# Altium PCB Control.Board.PcbDoc
Units mil, origin at the board's own origin, x right, y up, seen from the top; angles counter-clockwise.
Board outline 3070.87 x 4803.15 mil, 2 copper layers (Top Layer, Bottom Layer); 67 components, 96 nets, 356 pads, 14 vias.
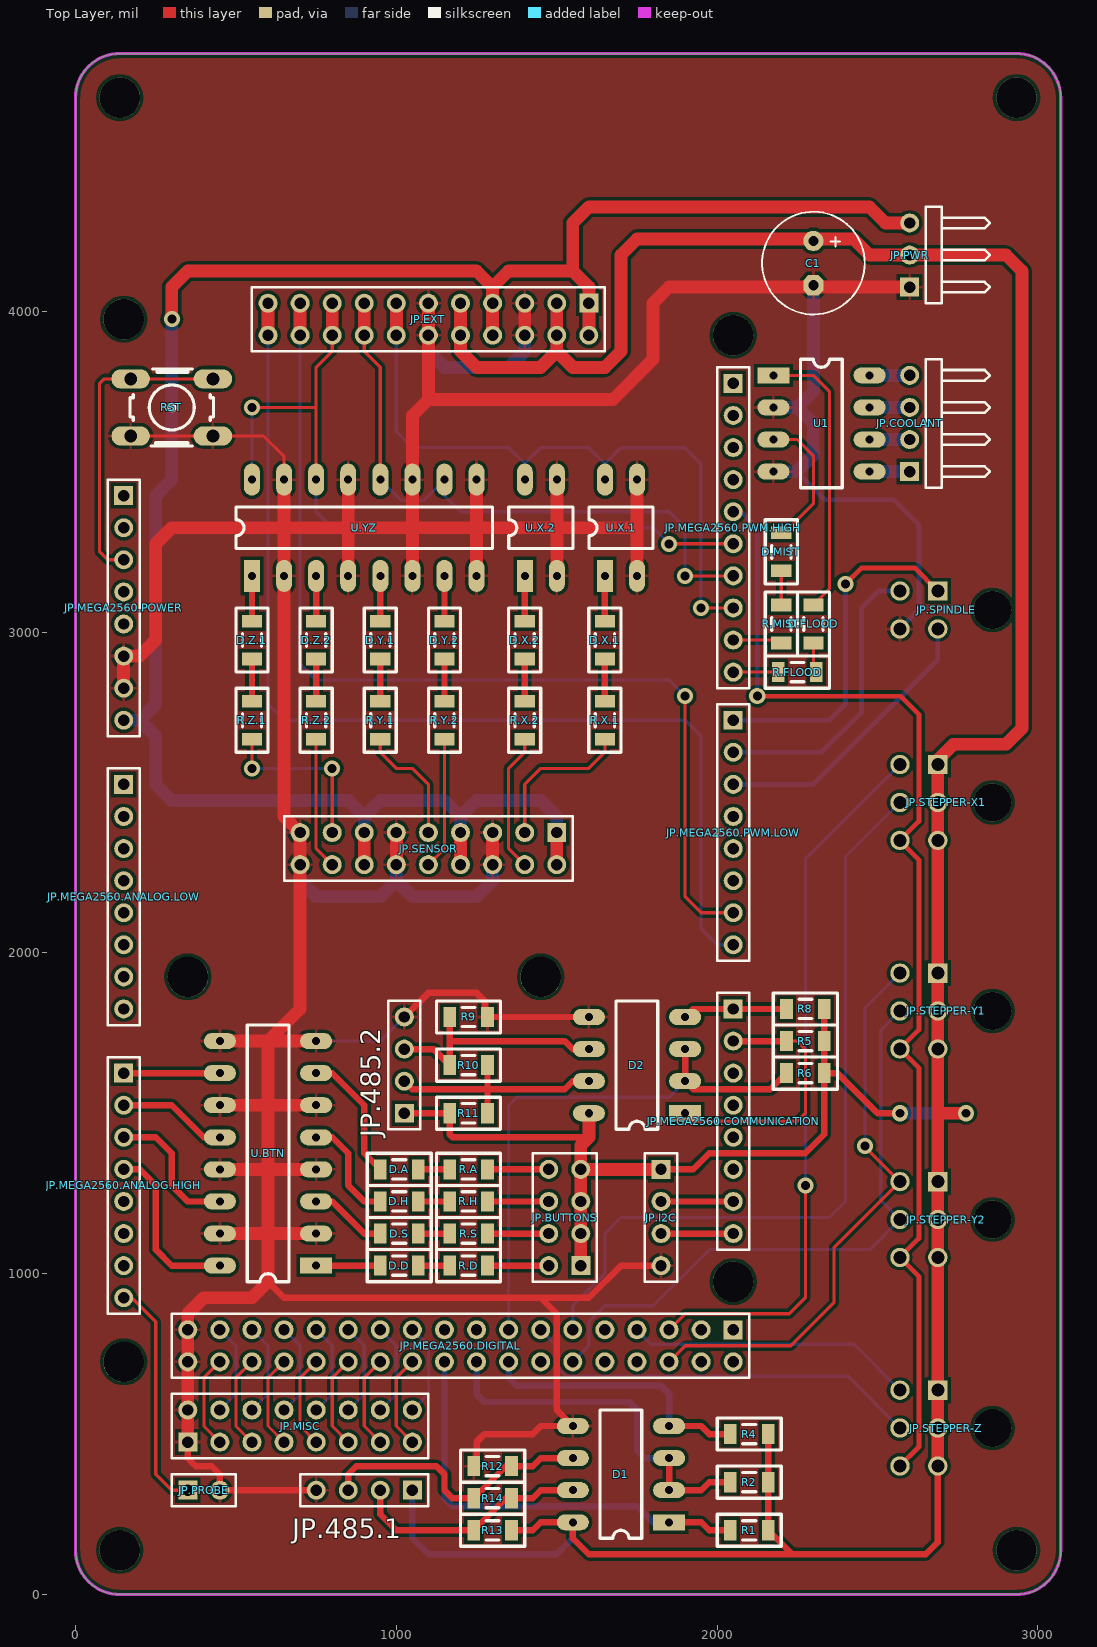
[diagram p0: Top Layer view]
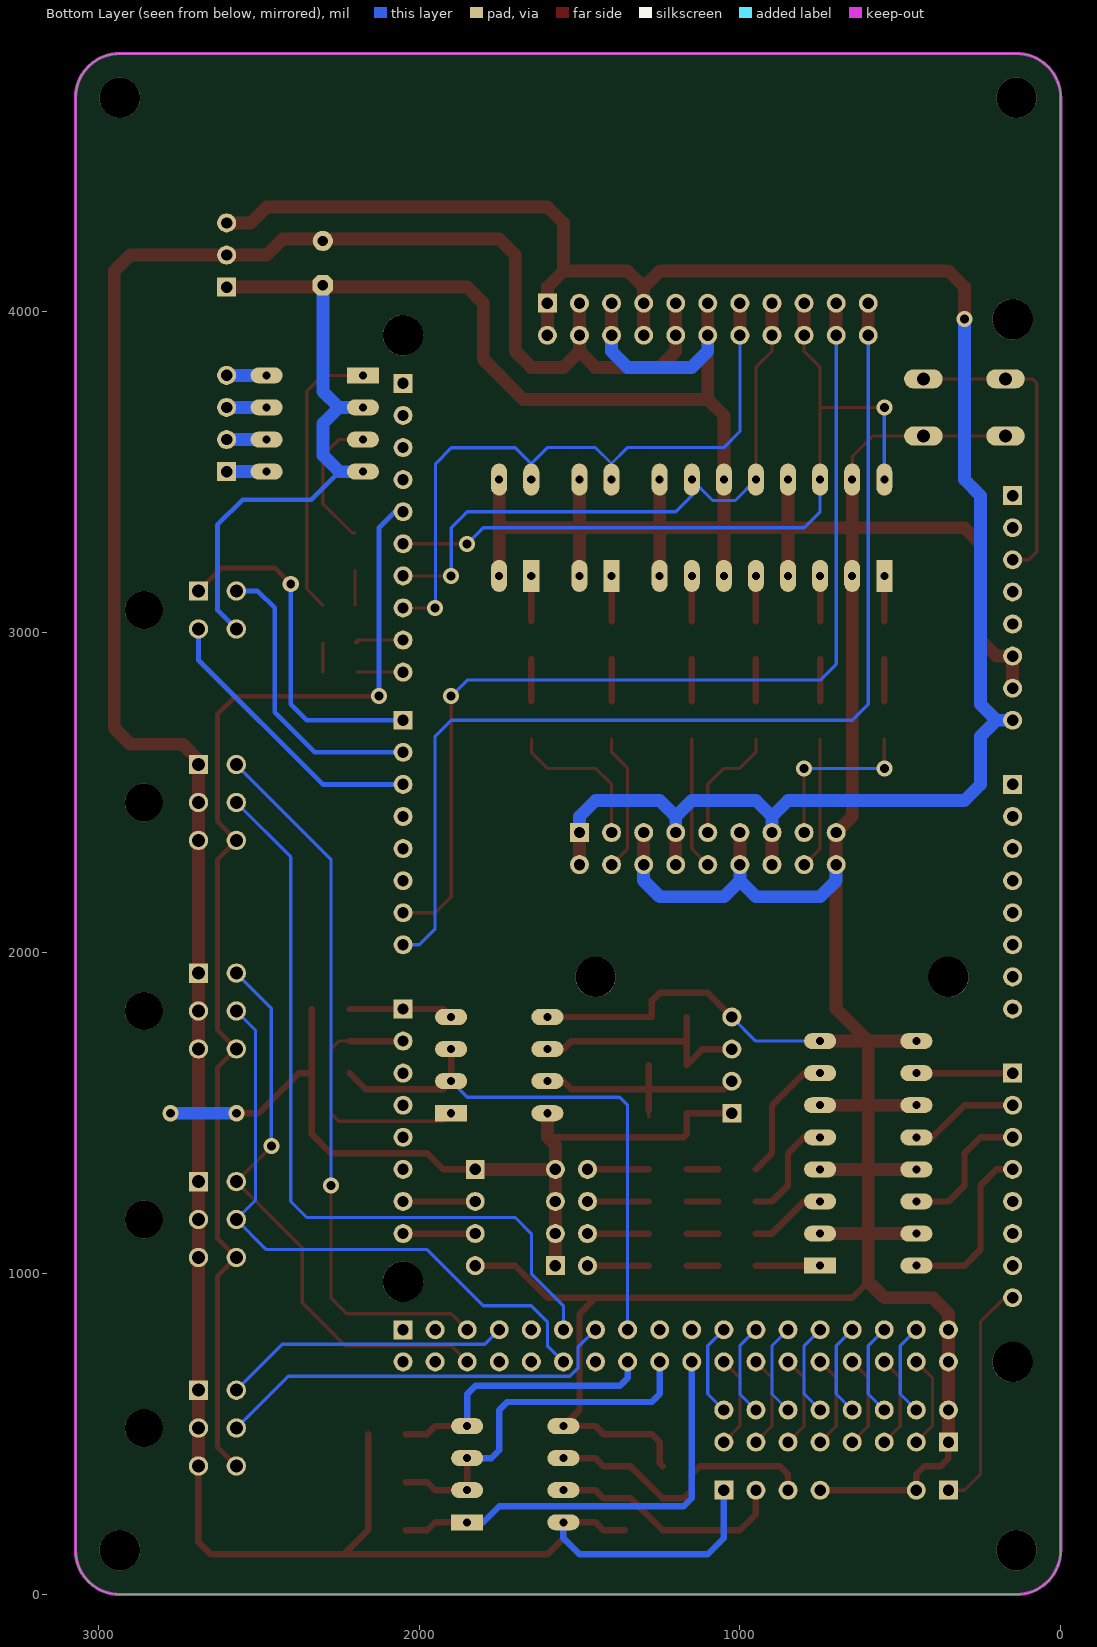
[diagram p1: Bottom Layer view, seen from below]
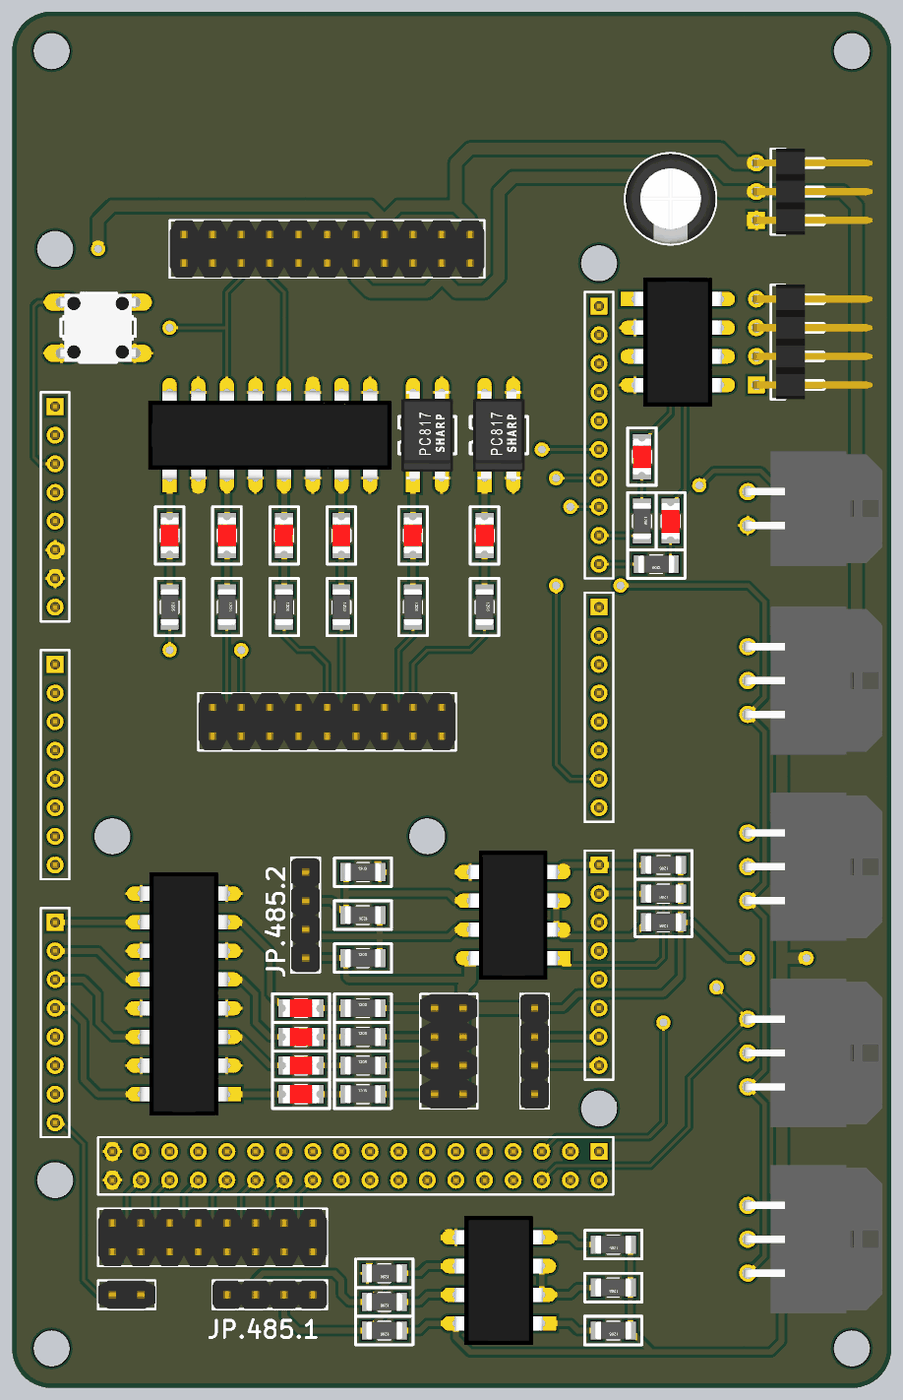
[diagram p2: 3D render of the assembled board from above, using the file's embedded part models]

## Layer stack, top to bottom
Top Solder: solder mask 0.4, Solder Resist, Dk 3.5
Top Layer: signal copper 1.4
Dielectric 1: dielectric 12.6, FR-4, Dk 4.8
Bottom Layer: signal copper 1.4
Bottom Solder: solder mask 0.4, Solder Resist, Dk 3.5

## Board outline
137.8,0 cw(c137.8,137.8) 0,137.8 0,4665.35 cw(c137.8,4665.35) 137.8,4803.15 2933.07,4803.15 cw(c2933.07,4665.35) 3070.87,4665.35 3070.87,137.8 cw(c2933.07,137.8) 2933.07,0

## Design rules (kind name [scope] priority, off if disabled: settings)
Clearance [All] p1: gap=10
HoleSize [All] p1: absolutevalues=TRUE maxlimit=248.03 minlimit=7.87 maxpercent=80.000 minpercent=20.000
PolygonConnect [All] p1: connectstyle=Relief reliefconductorwidth=10 reliefentries=4 polygonreliefangle="90 Angle" airgapwidth=10
RoutingVias [All] p1: holewidth=28 width=50 viastyle="Through Hole" minholewidth=28 minwidth=50 maxholewidth=28 maxwidth=50
SMDNeckDown [All] p1: percent=75.000
SilkToSilkClearance [All] p1: silktosilkclearance=6
SolderMaskExpansion [All] p1: expansion=4
Width [All] p1: maxlimit=100 minlimit=10 preferedwidth=10
28 further rules are at their usual default settings.

## Components (designator, comment, footprint, x,y, rotation, side; value= is the part's Value field where it differs from the comment)
C1 "*" E3,5-8 2300,4150 r270 top
D1 "MAX485" DIP8 1700,375 r180 top
D2 "MAX485" DIP8 1750,1650 r180 top
D.A "LED" 1206-SMD-LED 1009.06,1325 r180 top
D.D "LED" 1206-SMD-LED 1009.06,1025 r180 top
D.FLOOD "LED" 1206-SMD-LED 2300,3025 r90 top
D.H "LED" 1206-SMD-LED 1009.06,1225 r180 top
D.MIST "LED" 1206-SMD-LED 2200,3250 r90 top
D.S "LED" 1206-SMD-LED 1009.06,1125 r180 top
D.X.1 "LED" 1206-SMD-LED 1650,2975 r90 top
D.X.2 "LED" 1206-SMD-LED 1400,2975 r90 top
D.Y.1 "LED" 1206-SMD-LED 950,2975 r90 top
D.Y.2 "LED" 1206-SMD-LED 1150,2975 r90 top
D.Z.1 "LED" 1206-SMD-LED 550,2975 r90 top
D.Z.2 "LED" 1206-SMD-LED 750,2975 r90 top
JP.485.1 "HDR4" HDR1X4 900,325 r180 top
JP.485.2 "HDR4" HDR1X4 1025,1650 r90 top
JP.BUTTONS "HDR2X4" HDR2X4 1525,1175 r90 top
JP.COOLANT "HDR4" HDR1X4H 2600,3650 r90 top
JP.EXT "HDR2X11" HDR2X11 1100,3975 r180 top
JP.I2C "HDR4" HDR1X4 1825,1175 r270 top
JP.MEGA2560.ANALOG.HIGH "HDR8" HDR8-BOTTOM 150,1275 r270 top
JP.MEGA2560.ANALOG.LOW "HDR8" HDR8-BOTTOM 150,2175 r270 top
JP.MEGA2560.COMMUNICATION "HDR8" HDR8-BOTTOM 2050,1475 r270 top
JP.MEGA2560.DIGITAL "HDR2X18" HDR2X18-BOTTOM 1200,775 r180 top
JP.MEGA2560.POWER "HDR8" HDR8-BOTTOM 150,3075 r270 top
JP.MEGA2560.PWM.HIGH "HDR10" HDR10-BOTTOM 2050,3325 r270 top
JP.MEGA2560.PWM.LOW "HDR8" HDR8-BOTTOM 2050,2375 r270 top
JP.MISC "HDR2X8" HDR2X8 700,525 r0 top
JP.PROBE "HDR2" HDR1X2 400,325 r0 top
JP.PWR "HDR3" HDR1X3H 2600,4175 r90 top
JP.SENSOR "HDR2X9" HDR2X9 1100,2325 r180 top
JP.SPINDLE "43045-0400" 43045-0400 2857.87,3068.7 r90 top
JP.STEPPER-X1 "43045-0600" 43045-0600 2857.87,2468.7 r90 top
JP.STEPPER-Y1 "43045-0600" 43045-0600 2857.87,1818.7 r90 top
JP.STEPPER-Y2 "43045-0600" 43045-0600 2857.87,1168.7 r90 top
JP.STEPPER-Z "43045-0600" 43045-0600 2857.87,518.7 r90 top
R1 "10K" 1206-SMD-RES 2100,200 r0 top
R2 "10K" 1206-SMD-RES 2100,350 r0 top
R4 "10K" 1206-SMD-RES 2100,500 r0 top
R5 "10K" 1206-SMD-RES 2275,1725 r0 top
R6 "10K" 1206-SMD-RES 2275,1625 r0 top
R8 "10K" 1206-SMD-RES 2275,1825 r0 top
R9 "20K" 1206-SMD-RES 1225,1800 r180 top
R10 "120" 1206-SMD-RES 1225,1650 r0 top
R11 "20K" 1206-SMD-RES 1225,1500 r180 top
R12 "10K" 1206-SMD-RES 1300,400 r0 top
R13 "20K" 1206-SMD-RES 1300,200 r0 top
R14 "120" 1206-SMD-RES 1300,300 r0 top
R.A "100" 1206-SMD-RES 1225,1325 r180 top
R.D "100" 1206-SMD-RES 1225,1025 r180 top
R.FLOOD "100" 1206-SMD-RES 2250,2875 r0 top
R.H "100" 1206-SMD-RES 1225,1225 r180 top
R.MIST "100" 1206-SMD-RES 2200,3025 r90 top
R.S "100" 1206-SMD-RES 1225,1125 r180 top
R.X.1 "470" 1206-SMD-RES 1650,2725 r90 top
R.X.2 "470" 1206-SMD-RES 1400,2725 r90 top
R.Y.1 "470" 1206-SMD-RES 950,2725 r90 top
R.Y.2 "470" 1206-SMD-RES 1150,2725 r90 top
R.Z.1 "470" 1206-SMD-RES 550,2725 r90 top
R.Z.2 "470" 1206-SMD-RES 750,2725 r90 top
RST "OMRON SWITCH" B3F-10XX 300,3700 r180 top
U1 "LTV827" DIP8 2325,3650 r0 top
U.BTN "LTV847" DIP16 600,1375 r180 top
U.X.1 "PC817" DIP4 1700,3325 r90 top
U.X.2 "PC817" DIP4 1450,3325 r90 top
U.YZ "LTV847" DIP16 900,3325 r90 top

## Footprints (in the part's own frame and the unit in brackets; to place one, negate y for a bottom-side part, rotate by r counter-clockwise, add the part's x,y. Pads: shape width x height; smd on the part's side, far side on the other; paste and mask are expansions set on the pad)
1206-SMD-LED [mm]
  rect 1x1.6 smd: 1(-1.5,0) 2(1.5,0)
  silkscreen extent -2.54,-1.27 2.54,1.27, body extent -1.6,-0.8 1.6,0.8, height 1.11
1206-SMD-RES [mm]
  rect 1x1.6 smd: 1(-1.5,0) 2(1.5,0)
  silkscreen extent -2.54,-1.27 2.54,1.27, body extent -1.6,-0.8 1.6,0.8, height 1.01
43045-0400 [mm]
  round 3 hole 3 unplated: 0(0,0)
  rect 1.53x1.53 hole 1.02: 1(1.5,4.32)
  round 1.53 hole 1.02: 2(-1.5,4.32) 3(1.5,7.32) 4(-1.5,7.32)
  body extent -5.07,-4.6 5.07,7.64, height 8.78
43045-0600 [mm]
  round 3 hole 3 unplated: 0(0,0)
  rect 1.53x1.53 hole 1.02: 1(3,4.32)
  round 1.53 hole 1.02: 2(0,4.32) 3(-3,4.32) 4(3,7.32) 5(0,7.32) 6(-3,7.32)
  body extent -6.57,-4.6 6.57,7.64, height 8.78
B3F-10XX [mil]
  oval 120x60 hole 40: 1(-128,89) 2(128,89) 3(-128,-89) 4(128,-89)
  silkscreen extent -130,-120 130,120, body extent -152,-118 152,118, height 170
DIP4 [mil]
  rect 100x50 hole 25: 1(-150,49.64)
  oval 100x50 hole 25: 2(-150,-50.36) 3(150,-50.36) 4(150,49.64)
  silkscreen extent -65,-100 65,100, body extent -155,-90 155,90, height 169
DIP8 [mil]
  rect 100x50 hole 25: 1(-150,150)
  oval 100x50 hole 25: 2(-150,50) 3(-150,-50) 4(-150,-150) 5(150,-150) 6(150,-50) 7(150,50) 8(150,150)
  silkscreen extent -65,-200 65,200, body extent -155,-225 155,225, height 165
DIP16 [mil]
  rect 100x50 hole 25: 1(-150,350)
  oval 100x50 hole 25: 2(-150,250) 3(-150,150) 4(-150,50) 5(-150,-50) 6(-150,-150) 7(-150,-250) 8(-150,-350) 9(150,-350) 10(150,-250) 11(150,-150) 12(150,-50) 13(150,50) 14(150,150) 15(150,250) 16(150,350)
  silkscreen extent -65,-400 65,400, body extent -155,-425 155,425, height 165
E3,5-8 [mil]
  round 63 hole 32: +(-68.9,0)
  oct 63x63 hole 32: -(68.9,0)
  silkscreen extent -160,-160 160,160, body extent -158,-157 158,157, height 484
HDR1X2 [mm] "Connector; Header; 2 Position"
  rect 1.5x1.5 hole 0.9: 1(-1.27,0)
  round 1.5 hole 0.9: 2(1.27,0)
  silkscreen extent -2.54,-1.27 2.54,1.27, body extent -2.54,-1.27 2.54,1.27, height 8.61
HDR1X3H [mm] "Connector; Header; 3 Position; Right Angle"
  rect 1.5x1.5 hole 0.9: 1(-2.54,0)
  round 1.5 hole 0.9: 2(0,0) 3(2.54,0)
  silkscreen extent -3.81,-6.35 3.81,-1.27, body extent -3.81,-10.3 3.81,0.32, height 2.55
HDR1X4 [mm] "Connector; Header; 4 Position"
  rect 1.5x1.5 hole 0.9: 1(-3.81,0)
  round 1.5 hole 0.9: 2(-1.27,0) 3(1.27,0) 4(3.81,0)
  silkscreen extent -5.08,-1.27 5.08,1.27, body extent -5.08,-1.27 5.08,1.27, height 9.11
HDR1X4H [mm] "Connector; Header; 4 Position; Right Angle"
  rect 1.5x1.5 hole 0.9: 1(-3.81,0)
  round 1.5 hole 0.9: 2(-1.27,0) 3(1.27,0) 4(3.81,0)
  silkscreen extent -5.08,-6.35 5.08,-1.27, body extent -5.08,-10.3 5.08,0.32, height 2.55
HDR2X4 [mm] "Connector; Header; 4x2 Position"
  rect 1.5x1.5 hole 0.9: 1(-3.81,-1.27)
  round 1.5 hole 0.9: 2(-3.81,1.27) 3(-1.27,-1.27) 4(-1.27,1.27) 5(1.27,-1.27) 6(1.27,1.27) 7(3.81,-1.27) 8(3.81,1.27)
  silkscreen extent -5.08,-2.54 5.08,2.54, body extent -5.08,-2.54 5.08,2.54, height 8.61
HDR2X8 [mm] "Connector; Header; 8x2 Position"
  rect 1.5x1.5 hole 0.9: 1(-8.89,-1.27)
  round 1.5 hole 0.9: 2(-8.89,1.27) 3(-6.35,-1.27) 4(-6.35,1.27) 5(-3.81,-1.27) 6(-3.81,1.27) 7(-1.27,-1.27) 8(-1.27,1.27) 9(1.27,-1.27) 10(1.27,1.27) 11(3.81,-1.27) 12(3.81,1.27) 13(6.35,-1.27) 14(6.35,1.27) 15(8.89,-1.27) 16(8.89,1.27)
  silkscreen extent -10.16,-2.54 10.16,2.54, body extent -10.16,-2.54 10.16,2.54, height 8.61
HDR2X9 [mm] "Connector; Header; 9x2 Position"
  rect 1.5x1.5 hole 0.9: 1(-10.16,-1.27)
  round 1.5 hole 0.9: 2(-10.16,1.27) 3(-7.62,-1.27) 4(-7.62,1.27) 5(-5.08,-1.27) 6(-5.08,1.27) 7(-2.54,-1.27) 8(-2.54,1.27) 9(0,-1.27) 10(0,1.27) 11(2.54,-1.27) 12(2.54,1.27) 13(5.08,-1.27) 14(5.08,1.27) 15(7.62,-1.27) 16(7.62,1.27) 17(10.16,-1.27) 18(10.16,1.27)
  silkscreen extent -11.43,-2.54 11.43,2.54, body extent -11.43,-2.54 11.43,2.54, height 8.61
HDR2X11 [mm] "Connector; Header; 11x2 Position"
  rect 1.5x1.5 hole 0.9: 1(-12.7,-1.27)
  round 1.5 hole 0.9: 2(-12.7,1.27) 3(-10.16,-1.27) 4(-10.16,1.27) 5(-7.62,-1.27) 6(-7.62,1.27) 7(-5.08,-1.27) 8(-5.08,1.27) 9(-2.54,-1.27) 10(-2.54,1.27) 11(0,-1.27) 12(0,1.27) 13(2.54,-1.27) 14(2.54,1.27) 15(5.08,-1.27) 16(5.08,1.27) 17(7.62,-1.27) 18(7.62,1.27) 19(10.16,-1.27) 20(10.16,1.27) 21(12.7,-1.27) 22(12.7,1.27)
  silkscreen extent -13.97,-2.54 13.97,2.54, body extent -13.97,-2.54 13.97,2.54, height 8.61
HDR2X18-BOTTOM [mm]
  rect 1.5x1.5 hole 0.9: 1(-21.59,-1.27)
  round 1.5 hole 0.9: 2(-21.59,1.27) 3(-19.05,-1.27) 4(-19.05,1.27) 5(-16.51,-1.27) 6(-16.51,1.27) 7(-13.97,-1.27) 8(-13.97,1.27) 9(-11.43,-1.27) 10(-11.43,1.27) 11(-8.89,-1.27) 12(-8.89,1.27) 13(-6.35,-1.27) 14(-6.35,1.27) 15(-3.81,-1.27) 16(-3.81,1.27) 17(-1.27,-1.27) 18(-1.27,1.27) 19(1.27,-1.27) 20(1.27,1.27) 21(3.81,-1.27) 22(3.81,1.27) 23(6.35,-1.27) 24(6.35,1.27) 25(8.89,-1.27) 26(8.89,1.27) 27(11.43,-1.27) 28(11.43,1.27) 29(13.97,-1.27) 30(13.97,1.27) 31(16.51,-1.27) 32(16.51,1.27) 33(19.05,-1.27) 34(19.05,1.27) 35(21.59,-1.27) 36(21.59,1.27)
  silkscreen extent -22.86,-2.54 22.86,2.54, body extent -22.86,-2.54 22.86,2.54, height 8.61
HDR8-BOTTOM [mm]
  rect 1.5x1.5 hole 0.9: 1(-8.89,0)
  round 1.5 hole 0.9: 2(-6.35,0) 3(-3.81,0) 4(-1.27,0) 5(1.27,0) 6(3.81,0) 7(6.35,0) 8(8.89,0)
  silkscreen extent -10.16,-1.27 10.16,1.27, body extent -10.16,-1.27 10.16,1.27, height 9.11
HDR10-BOTTOM [mm]
  rect 1.5x1.5 hole 0.9: 1(-11.43,0)
  round 1.5 hole 0.9: 2(-8.89,0) 3(-6.35,0) 4(-3.81,0) 5(-1.27,0) 6(1.27,0) 7(3.81,0) 8(6.35,0) 9(8.89,0) 10(11.43,0)
  silkscreen extent -12.7,-1.27 12.7,1.27, body extent -12.7,-1.27 12.7,1.27, height 9.11

## Part data
C1: library part CAP.POL, "Polarized Capacitor (Radial)"
R1 R2 R4 R5 R6 R8 R9 R10 R11 R12 R13 R14 R.A R.D R.FLOOD R.H R.MIST R.S R.X.1 R.X.2 R.Y.1 R.Y.2 R.Z.1 R.Z.2: library part RES
RST: library part B3F-10-XX

## Free pads (board coordinates)
  round 125.98 hole 125.98 unplated: 0(137.8,137.8) 0(137.8,4665.35) 0(150,725) 0(150,3975) 0(350,1925) 0(1450,1925) 0(2050,975) 0(2050,3925) 0(2933.07,137.8) 0(2933.07,4665.35)

## Via types
v1: diameter 50, hole 28, Top Layer to Bottom Layer, 14 vias

## Nets (pads, with @x,y where several pads share a name; then routed paths per layer and width w, separated by ;. In a path a pad name is that pad's centre, name@x,y a point inside that pad or via, vN(x,y) a via of type N, cw(c..) or ccw(c..) an arc to the next point about the centre after c; other vN are vias at no path point)
+5V: C1.+ D1.8 D2.8 JP.485.1.1 JP.485.2.1 JP.BUTTONS.1 JP.BUTTONS.3 JP.BUTTONS.5 JP.BUTTONS.7 JP.EXT.3 JP.EXT.4 JP.EXT.9 JP.EXT.10 JP.I2C.1 JP.PWR.2 JP.STEPPER-X1.1 JP.STEPPER-X1.2 JP.STEPPER-X1.3 JP.STEPPER-Y1.1 JP.STEPPER-Y1.2 JP.STEPPER-Y1.3 JP.STEPPER-Y2.1 JP.STEPPER-Y2.2 JP.STEPPER-Y2.3 JP.STEPPER-Z.1 JP.STEPPER-Z.2 JP.STEPPER-Z.3 R1.2 R2.2 R4.2 R5.2 R6.2 R8.2 R11.2 R13.2 | length 12558.3
  Top Layer w20: JP.485.2.1 R11.2 1165.94,1434.06 1175,1425 1600,1425 ; R13.2 1425,200 1450,225 D1.8 1550,175 1600,125 2234.06,125 ; JP.I2C.1 1925,1325 1975,1375 2275,1375 2334.06,1434.06 R6.2 ; R4.2 R2.2 R1.2 2234.06,125 ; R8.2 R5.2 R6.2 ; v1(2569.69,1500) 2500,1500 2375,1625 R6.2 ; JP.STEPPER-Z.3 2687.79,162.79 2650,125 2234.06,125
  Top Layer w40: JP.EXT.9 JP.EXT.10 1200,3875 1250,3825 1450,3825 1500,3875 ; JP.EXT.3 JP.EXT.4 1500,3875 ; JP.BUTTONS.1 JP.BUTTONS.3 JP.BUTTONS.5 JP.BUTTONS.7 ; D2.8 1600,1425 1575,1400 JP.BUTTONS.7 ; JP.I2C.1 JP.BUTTONS.7 ; JP.STEPPER-Z.3 JP.STEPPER-Z.2 JP.STEPPER-Z.1 JP.STEPPER-Y2.3 JP.STEPPER-Y2.2 JP.STEPPER-Y2.1 ; 2687.79,1500 v1(2775,1500) ; 1500,3875 1550,3825 1650,3825 1700,3875 1700,4175 1750,4225 2293.9,4225 C1.+ 2306.1,4225 2425,4225 2475,4175 JP.PWR.2 2900,4175 2950,4125 2950,2700 2900,2650 2736.81,2650 2687.79,2600.98 JP.STEPPER-X1.1 JP.STEPPER-X1.2 JP.STEPPER-X1.3 JP.STEPPER-Y1.1 JP.STEPPER-Y1.2 JP.STEPPER-Y1.3 ; JP.STEPPER-Y2.1 JP.STEPPER-Y1.3 ; JP.STEPPER-Y2.1 JP.STEPPER-Y1.3
  Bottom Layer w20: JP.485.1.1 1050,175 1100,125 1500,125 1550,175 D1.8
  Bottom Layer w40: v1(2569.69,1500) v1(2775,1500)
A1: D1.6 JP.485.1.3 R12.2 R14.1 | length 882.8
  Top Layer w20: JP.485.1.3 850,375 875,400 1125,400 1150,375 1150,325 1175,300 R14.1 1340.94,400 R12.2 1425,400 1450,425 D1.6
A2: D2.6 JP.485.2.3 R9.2 R10.1 | length 756.1
  Top Layer w20: JP.485.2.3 1115.94,1700 R10.1 1165.94,1725 ; R9.2 1165.94,1725 ; D2.6 1550,1700 1525,1725 1165.94,1725
B1: D1.7 JP.485.1.2 R13.1 R14.2 | length 747.5
  Top Layer w20: JP.485.1.2 950,250 1000,200 R13.1 1340.94,300 R14.2 1425,300 1450,325 D1.7
B2: D2.7 JP.485.2.2 R10.2 R11.1 | length 757.5
  Top Layer w10: R11.1@1284.06,1488.19 R11.1 R11.1@1284.06,1509.06
  Top Layer w20: JP.485.2.2 1050,1575 1284.06,1575 ; R11.1@1284.06,1509.06 1284.06,1575 ; R10.2 1284.06,1575 ; D2.7 1550,1600 1525,1575 1284.06,1575
MEGA2560.A8.RESET.ABORT: JP.MEGA2560.ANALOG.HIGH.1 U.BTN.10 | length 300
  Top Layer w20: JP.MEGA2560.ANALOG.HIGH.1 U.BTN.10
MEGA2560.A9.FEED.HOLD: JP.MEGA2560.ANALOG.HIGH.2 U.BTN.12 | length 341.4
  Top Layer w20: JP.MEGA2560.ANALOG.HIGH.2 300,1525 400,1425 U.BTN.12
MEGA2560.A10.CYCLE.START: JP.MEGA2560.ANALOG.HIGH.3 U.BTN.14 | length 441.4
  Top Layer w20: JP.MEGA2560.ANALOG.HIGH.3 250,1425 300,1375 300,1275 350,1225 U.BTN.14
MEGA2560.A11.SAFETY.DOOR: JP.MEGA2560.ANALOG.HIGH.4 U.BTN.16 | length 541.4
  Top Layer w20: JP.MEGA2560.ANALOG.HIGH.4 200,1325 250,1275 250,1075 300,1025 U.BTN.16
MEGA2560.A15.PROBE: JP.MEGA2560.ANALOG.HIGH.8 JP.PROBE.1 | length 726.8
  Top Layer w10: JP.MEGA2560.ANALOG.HIGH.8 175,925 250,850 250,375 300,325 JP.PROBE.1
MEGA2560.D0.RXD0: JP.EXT.21 JP.EXT.22 JP.MEGA2560.PWM.LOW.8 | length 3362.1
  Top Layer w40: JP.EXT.22 JP.EXT.21
  Bottom Layer w10: JP.EXT.22 600,2775 650,2725 1900,2725 1950,2675 1950,2075 2000,2025 JP.MEGA2560.PWM.LOW.8
MEGA2560.D1.TXD0: JP.EXT.19 JP.EXT.20 JP.MEGA2560.PWM.LOW.7 | length 3162.1
  Top Layer w10: v1(1900,2800) 1900,2175 1950,2125 JP.MEGA2560.PWM.LOW.7
  Top Layer w40: JP.EXT.20 JP.EXT.19
  Bottom Layer w10: JP.EXT.20 700,2900 750,2850 1850,2850 v1(1900,2800)
MEGA2560.D5.SPINDLE.DIR: JP.MEGA2560.PWM.LOW.3 JP.SPINDLE.2 | length 895.3
  Bottom Layer w15: JP.MEGA2560.PWM.LOW.3 2300,2525 2687.79,2912.79 JP.SPINDLE.2
MEGA2560.D6.SPINDLE.EN: JP.MEGA2560.PWM.LOW.2 JP.SPINDLE.3 | length 918.3
  Bottom Layer w15: JP.MEGA2560.PWM.LOW.2 2325,2625 2450,2750 2450,3075 2502.76,3127.76 JP.SPINDLE.3
MEGA2560.D7.SPINDLE.PWM: JP.MEGA2560.PWM.LOW.1 JP.SPINDLE.1 | length 1084.1
  Top Layer w15: v1(2400,3150) 2450,3200 2615.55,3200 JP.SPINDLE.1
  Bottom Layer w15: JP.MEGA2560.PWM.LOW.1 2350,2725 2400,2775 v1(2400,3150)
MEGA2560.D8.COOLANT.FLOOD: JP.MEGA2560.PWM.HIGH.10 R.FLOOD.1 | length 140.9
  Top Layer w10: JP.MEGA2560.PWM.HIGH.10 R.FLOOD.1
MEGA2560.D9.COOLANT.MIST: JP.MEGA2560.PWM.HIGH.9 R.MIST.1 | length 157.9
  Top Layer w10: JP.MEGA2560.PWM.HIGH.9 2190.94,2975 2190.94,2968 2197.94,2968 R.MIST.1
MEGA2560.D10.LIMIT.X: JP.EXT.13 JP.EXT.14 JP.MEGA2560.PWM.HIGH.8 U.X.1.4 U.X.2.4 | length 2120.8
  Top Layer w10: v1(1950,3075) JP.MEGA2560.PWM.HIGH.8
  Top Layer w40: JP.EXT.14 JP.EXT.13
  Bottom Layer w10: JP.EXT.14 1000,3625 1050,3575 1350.72,3575 1400.36,3525.36 ; U.X.2.4 1400.36,3525.36 ; U.X.1.4 U.X.1.4@1650.36,3524.64 ; v1@1948.57,3076.43 1948.57,3525 1899.28,3574.28 1700,3574.28 U.X.1.4@1650.36,3524.64 ; 1400.36,3525.36 1450,3575 1600,3575 U.X.1.4@1650.36,3524.64
MEGA2560.D11.LIMIT.Y: JP.EXT.15 JP.EXT.16 JP.MEGA2560.PWM.HIGH.7 U.YZ.10 U.YZ.12 | length 1966
  Top Layer w10: JP.EXT.16 900,3875 950,3825 U.YZ.12 ; v1(1900,3175) JP.MEGA2560.PWM.HIGH.7
  Top Layer w40: JP.EXT.16 JP.EXT.15
  Bottom Layer w10: U.YZ.12 1015,3410 1085,3410 U.YZ.10 1150,3425 1200,3375 1850,3375 1900,3325 v1(1900,3175)
MEGA2560.D12.LIMIT.Z: JP.EXT.17 JP.EXT.18 JP.MEGA2560.PWM.HIGH.6 U.YZ.14 U.YZ.16 | length 2787.1
  Top Layer w10: v1(550,3700) 750,3700 ; JP.EXT.18 800,3875 750,3825 ; v1(1850,3275) JP.MEGA2560.PWM.HIGH.6 ; 750,3825 U.YZ.14 750,3825
  Top Layer w40: JP.EXT.18 JP.EXT.17
  Bottom Layer w10: U.YZ.16 v1(550,3700) ; U.YZ.14 750,3375 800,3325 1800,3325 v1(1850,3275)
MEGA2560.D13.STEPPER.EN: JP.MEGA2560.PWM.HIGH.5 JP.STEPPER-X1.6 JP.STEPPER-Y1.6 JP.STEPPER-Y2.6 JP.STEPPER-Z.6 | length 3686.8
  Top Layer w10: JP.MEGA2560.PWM.HIGH.5 JP.MEGA2560.PWM.HIGH.5@2075,3375
  Top Layer w15: v1(2125,2800) 2571.85,2800 2628.74,2743.11 2628.74,2409.65 JP.STEPPER-X1.6 2569.68,2349.41 2628.74,2290.35 2628.74,1759.65 JP.STEPPER-Y1.6 2628.74,1641.53 2628.74,1109.65 JP.STEPPER-Y2.6 2628.74,991.53 2628.74,459.65 JP.STEPPER-Z.6
  Bottom Layer w15: JP.MEGA2560.PWM.HIGH.5 2075,3375 2125,3325 v1(2125,2800)
MEGA2560.D14.TXD3: D2.4 JP.MEGA2560.COMMUNICATION.1 R8.1 | length 326.3
  Top Layer w20: D2.4 1925,1825 JP.MEGA2560.COMMUNICATION.1 R8.1
MEGA2560.D15.RXD3: D2.1 JP.MEGA2560.COMMUNICATION.2 R5.1 | length 831.1
  Top Layer w10: D2.1 1925,1475 2250,1475 2275,1500 2275,1700 2250,1725 R5.1
  Top Layer w20: JP.MEGA2560.COMMUNICATION.2 R5.1
MEGA2560.D16.TXD2: JP.MEGA2560.COMMUNICATION.3
MEGA2560.D17.RXD2: JP.MEGA2560.COMMUNICATION.4
MEGA2560.D18.TXD1: JP.MEGA2560.COMMUNICATION.5
MEGA2560.D19.RXD1: JP.MEGA2560.COMMUNICATION.6
MEGA2560.D20.SDA: JP.I2C.2 JP.MEGA2560.COMMUNICATION.7 | length 225
  Top Layer w20: JP.I2C.2 JP.MEGA2560.COMMUNICATION.7
MEGA2560.D21.SCL: JP.I2C.3 JP.MEGA2560.COMMUNICATION.8 | length 225
  Top Layer w20: JP.I2C.3 JP.MEGA2560.COMMUNICATION.8
MEGA2560.D24.STEP.X: JP.MEGA2560.DIGITAL.5 JP.STEPPER-X1.4 | length 2250.3
  Top Layer w10: JP.MEGA2560.DIGITAL.5 1900,875 2225,875 2275,925 v1(2275,1275)
  Bottom Layer w10: v1(2275,1275) 2275,2292.13 JP.STEPPER-X1.4
MEGA2560.D25.STEP.Y: JP.MEGA2560.DIGITAL.6 JP.STEPPER-Y1.4 JP.STEPPER-Y2.4 | length 1793.6
  Top Layer w10: JP.MEGA2560.DIGITAL.6 1900,775 2230,775 2364,909 2364,1081.13 JP.STEPPER-Y2.4 2460.63,1395.86 v1(2460.63,1397.64)
  Bottom Layer w10: v1(2460.63,1397.64) 2460.63,1827.76 JP.STEPPER-Y1.4
MEGA2560.D26.STEP.Z: JP.MEGA2560.DIGITAL.7 JP.STEPPER-Z.4 | length 897.6
  Bottom Layer w10: JP.MEGA2560.DIGITAL.7 1795,780 2426.49,780 JP.STEPPER-Z.4
MEGA2560.D30.DIR.X: JP.MEGA2560.DIGITAL.11 JP.STEPPER-X1.5 | length 2446.8
  Bottom Layer w10: JP.MEGA2560.DIGITAL.11 1550,900 1650,1000 1650,1125 1700,1175 2350,1175 2400,1225 2400,2299.02 JP.STEPPER-X1.5
MEGA2560.D31.DIR.Y: JP.MEGA2560.DIGITAL.12 JP.STEPPER-Y1.5 JP.STEPPER-Y2.5 | length 1947
  Bottom Layer w10: JP.MEGA2560.DIGITAL.12 1600,775 1600,850 1650,900 1800,900 1975,1075 2475.98,1075 JP.STEPPER-Y2.5 2509.84,1228.54 2509.84,1758.86 JP.STEPPER-Y1.5
MEGA2560.D32.DIR.Z: JP.MEGA2560.DIGITAL.13 JP.STEPPER-Z.5 | length 1284.6
  Bottom Layer w10: JP.MEGA2560.DIGITAL.13 1505,770 1505,705 1530,680 2408.38,680 JP.STEPPER-Z.5
MEGA2560.D34: D2.2 D2.3 JP.MEGA2560.DIGITAL.15 R6.1 | length 1728.1
  Top Layer w20: D2.3 D2.2 1925,1575 2165.94,1575 R6.1
  Bottom Layer w10: JP.MEGA2560.DIGITAL.15 1350,1525 1375,1550 1850,1550 D2.2
MEGA2560.D35: D1.4 JP.MEGA2560.DIGITAL.16 R4.1 | length 872
  Top Layer w20: D1.4 1950,525 1975,500 R4.1
  Bottom Layer w20: JP.MEGA2560.DIGITAL.16 1350,675 1375,650 1825,650 1850,625 D1.4
MEGA2560.D36: JP.MEGA2560.DIGITAL.17
MEGA2560.D37: D1.2 D1.3 JP.MEGA2560.DIGITAL.18 R2.1 | length 1157.4
  Top Layer w20: D1.3 D1.2 1950,325 1975,350 R2.1
  Bottom Layer w20: JP.MEGA2560.DIGITAL.18 1250,625 1275,600 1725,600 1750,575 1750,450 1775,425 D1.3
MEGA2560.D38: JP.MEGA2560.DIGITAL.19
MEGA2560.D39: D1.1 JP.MEGA2560.DIGITAL.20 R1.1 | length 1357.4
  Top Layer w20: D1.1 1950,225 1975,200 R1.1
  Bottom Layer w20: JP.MEGA2560.DIGITAL.20 1150,300 1175,275 1750,275 1800,225 D1.1
MEGA2560.D40: JP.MEGA2560.DIGITAL.21 JP.MISC.16 | length 291.4
  Bottom Layer w10: JP.MISC.16 1100,625 1100,775 JP.MEGA2560.DIGITAL.21
MEGA2560.D41: JP.MEGA2560.DIGITAL.22 JP.MISC.15 | length 291.4
  Top Layer w10: JP.MISC.15 1000,525 1000,675 JP.MEGA2560.DIGITAL.22
MEGA2560.D42: JP.MEGA2560.DIGITAL.23 JP.MISC.14 | length 291.4
  Bottom Layer w10: JP.MISC.14 1000,625 1000,775 JP.MEGA2560.DIGITAL.23
MEGA2560.D43: JP.MEGA2560.DIGITAL.24 JP.MISC.13 | length 291.4
  Top Layer w10: JP.MISC.13 900,525 900,675 JP.MEGA2560.DIGITAL.24
MEGA2560.D44: JP.MEGA2560.DIGITAL.25 JP.MISC.12 | length 291.4
  Bottom Layer w10: JP.MISC.12 900,625 900,775 JP.MEGA2560.DIGITAL.25
MEGA2560.D45: JP.MEGA2560.DIGITAL.26 JP.MISC.11 | length 291.4
  Top Layer w10: JP.MISC.11 800,525 800,675 JP.MEGA2560.DIGITAL.26
MEGA2560.D46: JP.MEGA2560.DIGITAL.27 JP.MISC.10 | length 291.4
  Bottom Layer w10: JP.MISC.10 800,625 800,775 JP.MEGA2560.DIGITAL.27
MEGA2560.D47: JP.MEGA2560.DIGITAL.28 JP.MISC.9 | length 291.4
  Top Layer w10: JP.MISC.9 700,525 700,675 JP.MEGA2560.DIGITAL.28
MEGA2560.D48: JP.MEGA2560.DIGITAL.29 JP.MISC.8 | length 291.4
  Bottom Layer w10: JP.MISC.8 700,625 700,775 JP.MEGA2560.DIGITAL.29
MEGA2560.D49: JP.MEGA2560.DIGITAL.30 JP.MISC.7 | length 291.4
  Top Layer w10: JP.MISC.7 600,525 600,675 JP.MEGA2560.DIGITAL.30
MEGA2560.D50: JP.MEGA2560.DIGITAL.31 JP.MISC.6 | length 291.4
  Bottom Layer w10: JP.MISC.6 600,625 600,775 JP.MEGA2560.DIGITAL.31
MEGA2560.D51: JP.MEGA2560.DIGITAL.32 JP.MISC.5 | length 291.4
  Top Layer w10: JP.MISC.5 500,525 500,675 JP.MEGA2560.DIGITAL.32
MEGA2560.D52: JP.MEGA2560.DIGITAL.33 JP.MISC.4 | length 291.4
  Bottom Layer w10: JP.MISC.4 500,625 500,775 JP.MEGA2560.DIGITAL.33
MEGA2560.D53: JP.MEGA2560.DIGITAL.34 JP.MISC.3 | length 291.4
  Top Layer w10: JP.MISC.3 400,525 400,675 JP.MEGA2560.DIGITAL.34
MEGA2560.GND: C1.- D1.5 D2.5 JP.485.1.4 JP.485.2.4 JP.EXT.5 JP.EXT.6 JP.EXT.11 JP.EXT.12 JP.I2C.4 JP.MEGA2560.DIGITAL.35 JP.MEGA2560.DIGITAL.36 JP.MEGA2560.POWER.6 JP.MEGA2560.POWER.7 JP.MISC.1 JP.MISC.2 JP.PROBE.2 JP.PWR.1 JP.SENSOR.5 JP.SENSOR.6 JP.SENSOR.11 JP.SENSOR.12 JP.SENSOR.17 JP.SENSOR.18 JP.SPINDLE.4 R9.1 R12.1 RST.1 RST.2 U1.2 U1.4 U.BTN.2 U.BTN.4 U.BTN.6 U.BTN.8 U.BTN.9 U.BTN.11 U.BTN.13 U.BTN.15 U.X.1.2 U.X.1.3 U.X.2.2 U.X.2.3 U.YZ.2 U.YZ.4 U.YZ.6 U.YZ.8 U.YZ.9 U.YZ.11 U.YZ.13 U.YZ.15 | length 17731.7
  Top Layer w10: RST.2 RST.1 586,3611 650,3547 U.YZ.15
  Top Layer w20: JP.MISC.1 350,425 375,400 425,400 450,375 JP.PROBE.2 JP.485.1.4 ; 600,975 650,925 1450,925 ; JP.485.2.4 1100,1875 1250,1875 1275,1850 ; R12.1 1250,409.06 1250,475 1275,500 1425,500 1450,525 D1.5 1500,575 1500,875 1450,925 ; D2.5 R9.1@1275,1800 ; JP.I2C.4 1700,1025 1600,925 1450,925 ; R9.1@1275,1800 1275,1850 ; R9.1@1275,1800 1275,1850
  Top Layer w40: JP.MEGA2560.POWER.7 JP.MEGA2560.POWER.6 200,2925 250,2975 250,3275 300,3325 650,3325 ; JP.MISC.1 JP.MISC.2 JP.MEGA2560.DIGITAL.36 JP.MEGA2560.DIGITAL.35 350,875 400,925 550,925 600,975 600,1125 ; U.BTN.15 600,1125 ; U.BTN.13 600,1325 ; U.BTN.11 600,1525 ; U.BTN.9 600,1725 ; U.YZ.15 650,3325 ; U.BTN.2 600,1125 ; U.BTN.4 600,1325 ; U.BTN.6 600,1525 ; U.BTN.8 600,1725 ; U.YZ.4 850,3325 ; U.YZ.13 850,3325 ; JP.SENSOR.12 JP.SENSOR.11 ; U.YZ.6 1050,3325 ; JP.EXT.11 JP.EXT.12 1100,3725 ; U.YZ.8 1250,3325 ; U.YZ.9 1250,3325 ; JP.SENSOR.6 JP.SENSOR.5 ; JP.EXT.6 JP.EXT.5 ; U.X.2.2 1500.36,3325 ; U.X.2.3 1500.36,3325 ; U.X.1.2 1750.36,3325 ; U.X.1.3 1750.36,3325 ; JP.PWR.1 2306.1,4075 C1.- 2293.9,4075 1850,4075 1800,4025 1800,3850 1675,3725 1100,3725 ; 600,1125 600,1325 ; 600,1325 600,1525 ; 600,1525 600,1725 ; 600,1725 700,1825 JP.SENSOR.18 JP.SENSOR.17 650,2425 U.YZ.2 650,3325 ; 650,3325 850,3325 ; 850,3325 1050,3325 ; 1050,3325 1250,3325 ; 1050,3325 U.YZ.11 1050,3675 1100,3725 ; 1250,3325 1500.36,3325 ; 1500.36,3325 1750.36,3325
  Bottom Layer w10: U.BTN.8 950,1725 JP.485.2.4 ; U1.4 U1.4@2200,3500 ; U1.2 U1.2@2200,3700 ; U1.4@2200,3500 2200,3499.64 U1.4@2200,3500 ; U1.2@2200,3700 2200,3699.64 U1.2@2200,3700
  Bottom Layer w15: 2248.21,3499.64 2335.45,3412.4 2550,3412.4 2628.74,3333.66 2628.74,3068.7 JP.SPINDLE.4
  Bottom Layer w40: JP.SENSOR.18 700,2225 750,2175 950,2175 1000,2225 ; JP.SENSOR.12 1000,2225 ; JP.EXT.12 1100,3875 1150,3825 1350,3825 1400,3875 JP.EXT.6 ; JP.SENSOR.6 1300,2225 1250,2175 1050,2175 1000,2225 ; U1.4@2200,3499.64 2248.21,3499.64 2299.28,3550.72 2299.28,3650 2249.64,3699.64 ; U1.2@2200,3699.64 2249.64,3699.64 ; C1.- 2300,3750 2249.64,3699.64
MEGA2560.RESET: JP.MEGA2560.POWER.3 RST.3 RST.4 | length 969.2
  Top Layer w10: JP.MEGA2560.POWER.3 100,3225 75,3250 75,3775 89,3789 RST.4 RST.3
MEGA2560.VIN.12V: JP.EXT.1 JP.EXT.2 JP.EXT.7 JP.EXT.8 JP.MEGA2560.POWER.8 JP.PWR.3 JP.SENSOR.1 JP.SENSOR.2 JP.SENSOR.7 JP.SENSOR.8 JP.SENSOR.13 JP.SENSOR.14 | length 6410.7
  Top Layer w40: v1(300,3975) 300,4075 350,4125 1250,4125 1300,4075 ; JP.SENSOR.14 JP.SENSOR.13 ; JP.SENSOR.8 JP.SENSOR.7 ; JP.EXT.8 JP.EXT.7 1300,4075 ; JP.SENSOR.2 JP.SENSOR.1 ; JP.EXT.2 JP.EXT.1 1600,4075 1550,4125 ; JP.PWR.3 2525,4275 2475,4325 1600,4325 1550,4275 1550,4125 ; 1300,4075 1350,4125 1550,4125
  Bottom Layer w40: JP.MEGA2560.POWER.8 200,2725 ; v1(300,3975) 300,3475 250,3425 250,2775 200,2725 ; JP.SENSOR.13 900,2425 ; JP.SENSOR.7 1200,2425 ; JP.SENSOR.1 1500,2425 1450,2475 1325,2475 1250,2475 1200,2425 ; 200,2725 250,2675 250,2525 300,2475 850,2475 900,2425 ; 900,2425 950,2475 1150,2475 1200,2425
NetD.A_1: D.A.1 R.A.2 | length 97.8
  Top Layer w20: D.A.1 R.A.2
NetD.A_2: D.A.2 U.BTN.7 | length 412.1
  Top Layer w20: U.BTN.7 800,1625 900,1525 900,1375 D.A.2
NetD.D_1: D.D.1 R.D.2 | length 97.8
  Top Layer w20: D.D.1 R.D.2
NetD.D_2: D.D.2 U.BTN.1 | length 200
  Top Layer w20: U.BTN.1 D.D.2
NetD.FLOOD_1: D.FLOOD.1 R.FLOOD.2 | length 181.9
  Top Layer w10: R.FLOOD.2@2300,2875 D.FLOOD.1 R.FLOOD.2@2300,2875
NetD.FLOOD_2: D.FLOOD.2 U1.1 | length 882.4
  Top Layer w10: U1.1 2300,3800 2350,3750 2350,3134.06 D.FLOOD.2
NetD.H_1: D.H.1 R.H.2 | length 97.8
  Top Layer w20: D.H.1 R.H.2
NetD.H_2: D.H.2 U.BTN.5 | length 341.4
  Top Layer w20: U.BTN.5 800,1425 850,1375 850,1275 900,1225 D.H.2
NetD.MIST_1: D.MIST.1 R.MIST.2 | length 106.9
  Top Layer w10: R.MIST.2 D.MIST.1
NetD.MIST_2: D.MIST.2 U1.3 | length 408.2
  Top Layer w10: D.MIST.2 2209.06,3309.06 2300,3400 2300,3550 2250.36,3599.64 U1.3@2200,3599.64
NetD.S_1: D.S.1 R.S.2 | length 97.8
  Top Layer w20: D.S.1 R.S.2
NetD.S_2: D.S.2 U.BTN.3 | length 241.4
  Top Layer w20: U.BTN.3 800,1225 900,1125 D.S.2
NetD.X.1_1: D.X.1.1 R.X.1.2 | length 131.9
  Top Layer w20: R.X.1.2 D.X.1.1
NetD.X.1_2: D.X.1.2 U.X.1.1 | length 140.6
  Top Layer w20: D.X.1.2 U.X.1.1@1650,3174.64
NetD.X.2_1: D.X.2.1 R.X.2.2 | length 131.9
  Top Layer w20: R.X.2.2 D.X.2.1
NetD.X.2_2: D.X.2.2 U.X.2.1 | length 140.6
  Top Layer w20: D.X.2.2 U.X.2.1@1400,3174.64
NetD.Y.1_1: D.Y.1.1 R.Y.1.2 | length 131.9
  Top Layer w20: R.Y.1.2 D.Y.1.1
NetD.Y.1_2: D.Y.1.2 U.YZ.5 | length 140.9
  Top Layer w20: D.Y.1.2 U.YZ.5
NetD.Y.2_1: D.Y.2.1 R.Y.2.2 | length 131.9
  Top Layer w20: R.Y.2.2 D.Y.2.1
NetD.Y.2_2: D.Y.2.2 U.YZ.7 | length 140.9
  Top Layer w20: D.Y.2.2 U.YZ.7
NetD.Z.1_1: D.Z.1.1 R.Z.1.2 | length 131.9
  Top Layer w20: R.Z.1.2 D.Z.1.1
NetD.Z.1_2: D.Z.1.2 U.YZ.1 | length 140.9
  Top Layer w20: D.Z.1.2 U.YZ.1
NetD.Z.2_1: D.Z.2.1 R.Z.2.2 | length 131.9
  Top Layer w20: R.Z.2.2 D.Z.2.1
NetD.Z.2_2: D.Z.2.2 U.YZ.3 | length 140.9
  Top Layer w20: D.Z.2.2 U.YZ.3
NetJP.BUTTONS_2: JP.BUTTONS.2 R.D.1 | length 190.9
  Top Layer w20: R.D.1 JP.BUTTONS.2
NetJP.BUTTONS_4: JP.BUTTONS.4 R.S.1 | length 190.9
  Top Layer w20: R.S.1 JP.BUTTONS.4
NetJP.BUTTONS_6: JP.BUTTONS.6 R.H.1 | length 190.9
  Top Layer w20: R.H.1 JP.BUTTONS.6
NetJP.BUTTONS_8: JP.BUTTONS.8 R.A.1 | length 190.9
  Top Layer w20: R.A.1 JP.BUTTONS.8
NetJP.COOLANT_1: JP.COOLANT.1 U1.5 | length 125
  Bottom Layer w10: U1.5 U1.5@2500.36,3500
  Bottom Layer w40: U1.5@2500.36,3500 JP.COOLANT.1
NetJP.COOLANT_2: JP.COOLANT.2 U1.6 | length 125
  Bottom Layer w10: U1.6 U1.6@2500.36,3600
  Bottom Layer w40: U1.6@2500.36,3600 JP.COOLANT.2
NetJP.COOLANT_3: JP.COOLANT.3 U1.7 | length 125
  Bottom Layer w10: U1.7 U1.7@2500.36,3700
  Bottom Layer w40: U1.7@2500.36,3700 JP.COOLANT.3
NetJP.COOLANT_4: JP.COOLANT.4 U1.8 | length 125.9
  Bottom Layer w10: U1.8 U1.8@2500,3800 ; U1.8@2500,3800 2500,3799.64 U1.8@2500,3800
  Bottom Layer w40: U1.8@2500,3799.64 2599.64,3799.64 JP.COOLANT.4
SENSOR.LIMIT.X.1: JP.SENSOR.3 R.X.1.1 | length 482.4
  Top Layer w10: JP.SENSOR.3 1400,2525 1450,2575 1600,2575 1650,2625 R.X.1.1
SENSOR.LIMIT.X.2: JP.SENSOR.4 R.X.2.1 | length 432.4
  Top Layer w10: JP.SENSOR.4 1350,2325 1350,2575 1400,2625 R.X.2.1
SENSOR.LIMIT.Y.1: JP.SENSOR.9 R.Y.1.1 | length 382.4
  Top Layer w10: R.Y.1.1 950,2625 1000,2575 1050,2575 1100,2525 JP.SENSOR.9
SENSOR.LIMIT.Y.2: JP.SENSOR.10 R.Y.2.1 | length 411.7
  Top Layer w10: JP.SENSOR.10 1150,2325 R.Y.2.1
SENSOR.LIMIT.Z.1: JP.SENSOR.15 R.Z.1.1 | length 540.9
  Top Layer w10: v1(550,2575) R.Z.1.1 ; JP.SENSOR.15 v1(800,2575)
  Bottom Layer w10: v1(550,2575) v1(800,2575)
SENSOR.LIMIT.Z.2: JP.SENSOR.16 R.Z.2.1 | length 411.7
  Top Layer w10: R.Z.2.1 750,2325 JP.SENSOR.16
pads on no net: JP.MEGA2560.ANALOG.HIGH.5 JP.MEGA2560.ANALOG.HIGH.6 JP.MEGA2560.ANALOG.HIGH.7 JP.MEGA2560.ANALOG.LOW.1 JP.MEGA2560.ANALOG.LOW.2 JP.MEGA2560.ANALOG.LOW.3 JP.MEGA2560.ANALOG.LOW.4 JP.MEGA2560.ANALOG.LOW.5 JP.MEGA2560.ANALOG.LOW.6 JP.MEGA2560.ANALOG.LOW.7 JP.MEGA2560.ANALOG.LOW.8 JP.MEGA2560.DIGITAL.1 JP.MEGA2560.DIGITAL.2 JP.MEGA2560.DIGITAL.3 JP.MEGA2560.DIGITAL.4 JP.MEGA2560.DIGITAL.8 JP.MEGA2560.DIGITAL.9 JP.MEGA2560.DIGITAL.10 JP.MEGA2560.DIGITAL.14 JP.MEGA2560.POWER.1 JP.MEGA2560.POWER.2 JP.MEGA2560.POWER.4 JP.MEGA2560.POWER.5 JP.MEGA2560.PWM.HIGH.1 JP.MEGA2560.PWM.HIGH.2 JP.MEGA2560.PWM.HIGH.3 JP.MEGA2560.PWM.HIGH.4 JP.MEGA2560.PWM.LOW.4 JP.MEGA2560.PWM.LOW.5 JP.MEGA2560.PWM.LOW.6 JP.SPINDLE.0 JP.STEPPER-X1.0 JP.STEPPER-Y1.0 JP.STEPPER-Y2.0 JP.STEPPER-Z.0

## Polygon pours and split planes (outlines as drawn)
MEGA2560.GND on Top Layer "Top Layer GND" (solid, pour order 4): 0,0 3070.87,0 3070.87,4803.15 0,4803.15

## Keep-outs
Keep-Out Layer:
  the board outline again, w10

## Text inside footprints (layer, text, board x,y; h text height)
JP.BUTTONS: Mechanical 16 "2" at 1500,925 h50 r90; Mechanical 16 "1" at 1600,935 h50 r90; Mechanical 16 "7" at 1600,1395 h50 r90; Mechanical 16 "8" at 1500,1395 h50 r90
JP.EXT: Mechanical 16 "22" at 530,3950 h50 r180; Mechanical 16 "21" at 530,4050 h50 r180; Mechanical 16 "2" at 1700,3950 h50 r180; Mechanical 16 "1" at 1690,4050 h50 r180
JP.MEGA2560.DIGITAL: Mechanical 16 "36" at 280,750 h50 r180; Mechanical 16 "35" at 280,850 h50 r180; Mechanical 16 "1" at 2140,850 h50 r180; Mechanical 16 "2" at 2150,750 h50 r180
JP.MISC: Mechanical 16 "16" at 1120,550 h50; Mechanical 16 "15" at 1120,450 h50; Mechanical 16 "1" at 260,450 h50; Mechanical 16 "2" at 250,550 h50
JP.SENSOR: Mechanical 16 "2" at 1600,2300 h50 r180; Mechanical 16 "1" at 1590,2400 h50 r180; Mechanical 16 "17" at 630,2400 h50 r180; Mechanical 16 "18" at 630,2300 h50 r180
RST: Mechanical 16 "4" at 160,3810 h77.5 r180; Mechanical 16 "3" at 480,3810 h77.5 r180; Mechanical 16 "2" at 160,3640 h77.5 r180; Mechanical 16 "1" at 470,3635 h77.5 r180